# Altium PCB PDB REV 23.PcbDoc (part 2 of 2)
Units mil, origin at the board's own origin, x right, y up, seen from the top; angles counter-clockwise.
Board outline 3000 x 3000 mil, 4 copper layers (POWER/SIGNAL, SIG_GND, GND, Signal), stack 23.756 mil thick; 77 components, 56 nets, 261 pads, 101 vias.
Unrouted connection lines stored in the file: 79.
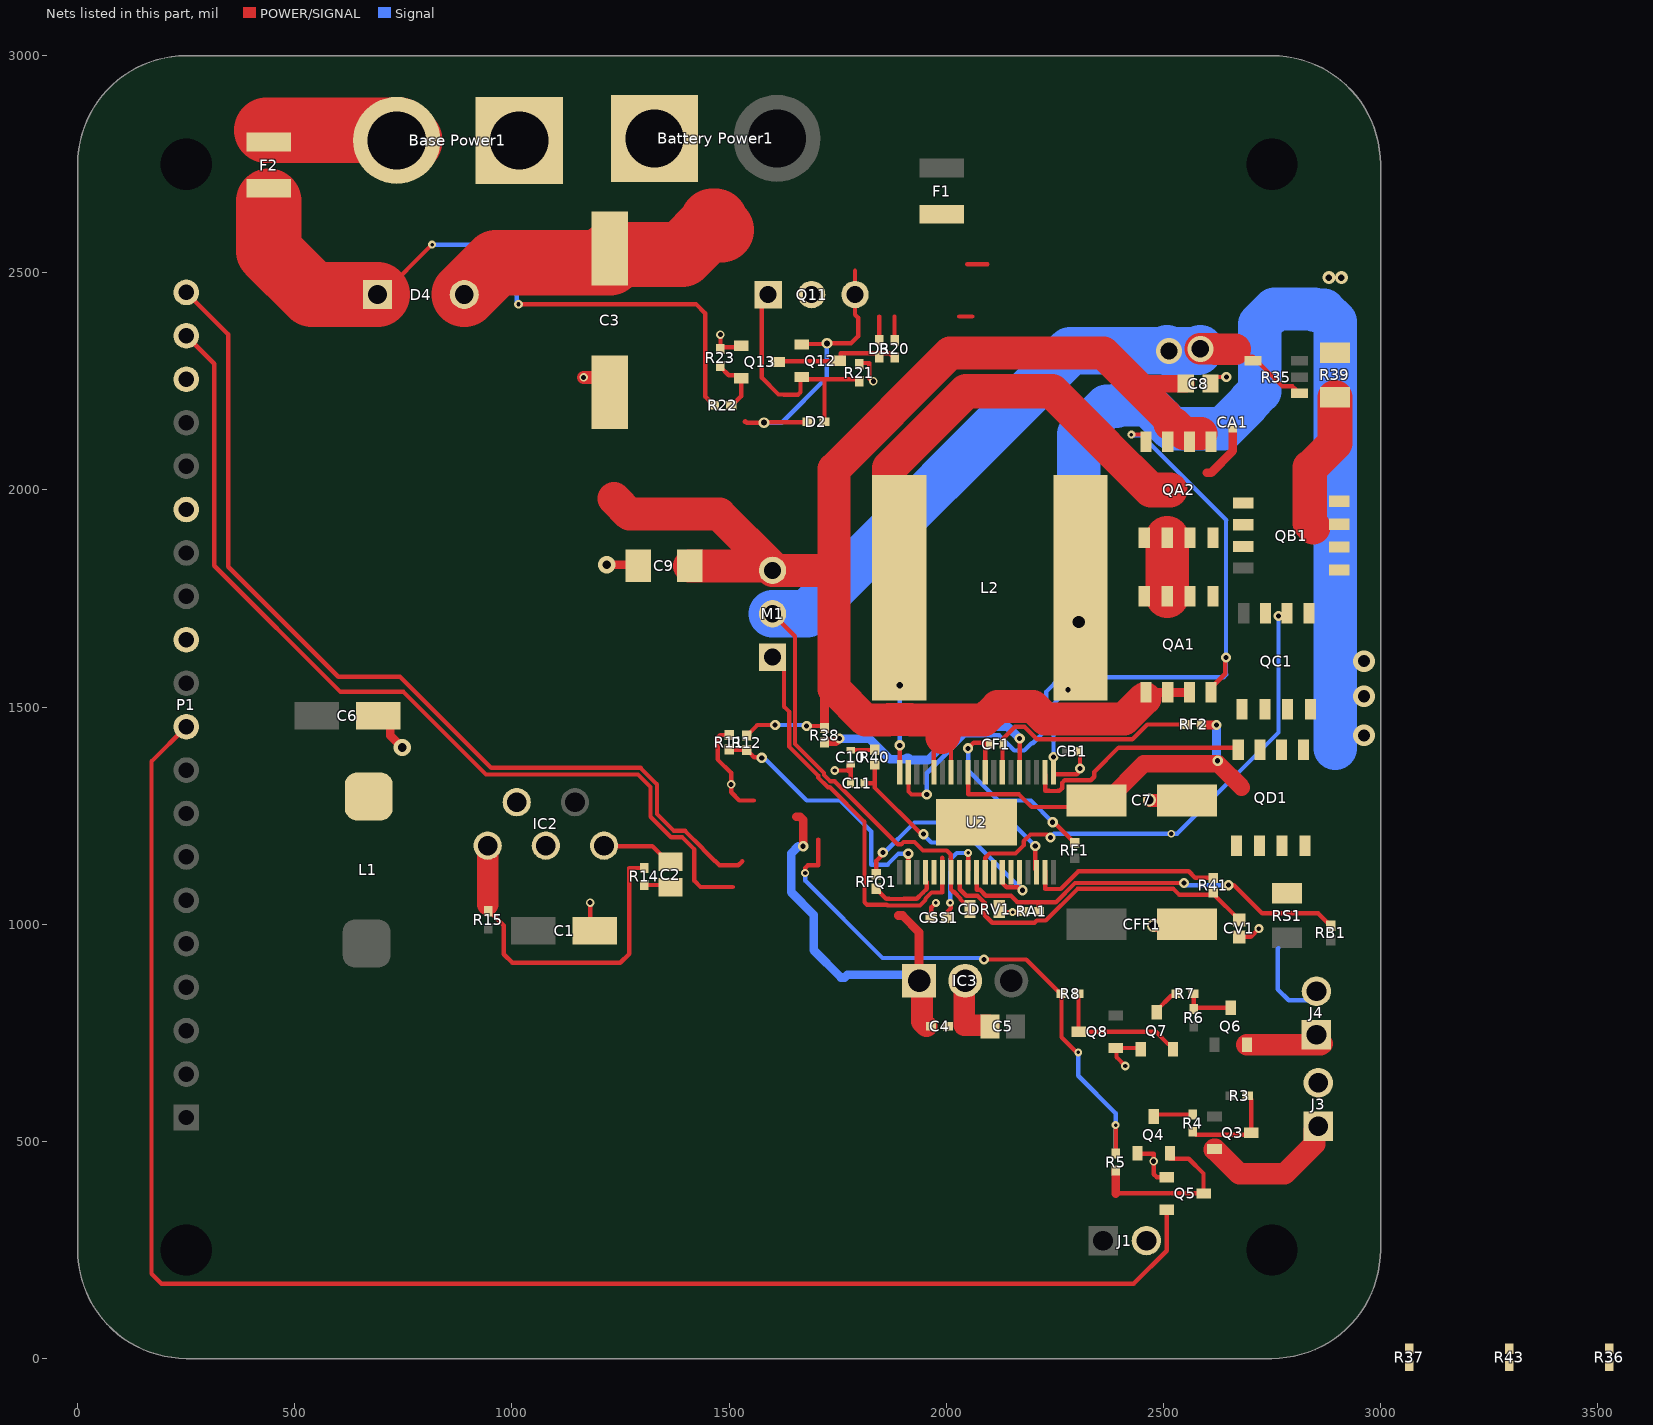
[diagram p4: the nets of this part, all layers, seen from the top]

## Via types
v1: diameter 23.62, hole 11.81, POWER/SIGNAL to Signal, 40 vias
v2: diameter 19.68, hole 11.81, POWER/SIGNAL to Signal, 12 vias
v3: diameter 18, hole 8, POWER/SIGNAL to Signal, 10 vias
v4: diameter 20, hole 10, POWER/SIGNAL to Signal, 10 vias
v5: diameter 18, hole 10, POWER/SIGNAL to Signal, 7 vias
v6: diameter 50, hole 28, POWER/SIGNAL to Signal, 4 vias
v7: diameter 45, hole 30, POWER/SIGNAL to Signal, 4 vias
v8: diameter 25, hole 14, POWER/SIGNAL to Signal, 3 vias
v9: diameter 60, hole 40, POWER/SIGNAL to Signal, 2 vias
v10: diameter 30, hole 20, POWER/SIGNAL to Signal, 2 vias
v11: diameter 40, hole 20, POWER/SIGNAL to Signal, 2 vias
v12: diameter 30, hole 15, POWER/SIGNAL to Signal, 2 vias
v13: diameter 25, hole 15, POWER/SIGNAL to Signal, 1 vias
v14: diameter 17.8, hole 8, POWER/SIGNAL to Signal, 1 vias
v15: diameter 60, hole 30, POWER/SIGNAL to Signal, 1 vias

## Nets (pads, with @x,y where several pads share a name; then routed paths per layer and width w, separated by ;. In a path a pad name is that pad's centre, name@x,y a point inside that pad or via, vN(x,y) a via of type N, cw(c..) or ccw(c..) an arc to the next point about the centre after c; other vN are vias at no path point) (continued)
DRVCC: CDRV1.2 M1.2 R35.1 R35.4 U2.7 | length 2515.7
  POWER/SIGNAL w10: M1.2@1600,1715 1651.65,1663.35 1651.65,1415.03 1718.5,1348.18 1718.5,1343.64 1733.14,1329 1743.39,1329 1887.99,1184.4 1896.41,1184.4 1901.41,1189.4 1927.05,1189.4 1946.45,1170 2001.23,1170 2010.44,1160.78 2010.44,1124.5 2010.94,1124 2010.94,1080 2017.44,1073.5 2018.94,1073.5 2033,1059.44 2033,1057.1 CDRV1.2@2055.1,1035 ; v9(2585,2325) 2619.8,2325 2620.24,2324.56 2637.4,2307.4 2696.5,2307.4 2705.5,2307.4 2774.3,2238.6 2797.5,2238.6 R35.4@2803.5,2232.6
  POWER/SIGNAL w73: v9(2585,2325) 2620.24,2324.56 2665,2324
  Signal w110: M1.2@1600,1715 1680,1715 2285.81,2320.81 v9@2502.45,2320.81 ; v9@2503.26,2320 2508.26,2325 2513,2320.26 v9(2513,2320) 2580,2320 v9(2585,2325)
FET_A: C3.1 C8.2 C9.2 D4.3 M1.3 Q11.2 QA1.1 QA1.2 QA1.3 QA2.1 QA2.2 QA2.3 R12.1 R38.1 U2.32 U2.34 | length 4523.3
  POWER/SIGNAL w10: R12.1@1541,1434.73 1541,1435.72 1546.83,1441.54 1547.81,1441.54 1565.03,1458.77 v1(1606.04,1458.77) ; v1(1678.5,1456.5) 1714.58,1456.5 1714.75,1456.67 R38.1@1719.68,1451.73 ; U2.34@1971.57,1350.16 1971.57,1410.85 1990.5,1429.77 2010.94,1409.33 U2.32@2010.94,1350.16
  POWER/SIGNAL w20: R38.1@1719.68,1451.73 1719.68,1519.86 1741.69,1541.87 ; 2396.22,1470 2398.38,1472.16 2446.38,1520.16 2457.2,1520.16 2460,1522.95 QA1.1@2460,1533.78 QA1.2@2510,1533.78 QA1.3@2560,1533.78
  POWER/SIGNAL w40: 2447.64,2230 2462.64,2245 C8.2@2551.46,2245
  POWER/SIGNAL w76: 1235,1980 1270.34,1944.66 1477.33,1944.66 1596.98,1825 C9.2@1409.06,1825 ; M1.3@1600,1815 1741.69,1815 ; 1990.5,1429.77 1995,1434.27 ; QA1.1@2457.2,1520.16 2409.2,1472.16 2398.38,1472.16 2228.72,1472.16 2203.54,1497.35 2203.54,1497.7 2199.88,1501.35 2118.24,1501.35 2086.89,1470 1919.59,1470 1917.77,1471.81 1868.23,1471.81 1866.41,1470 1813.56,1470 1741.69,1541.87 1741.69,1815 ; 2504.81,2172.7 2447.64,2229.88 2447.64,2230 2362.64,2315 2008.6,2315 1741.69,2048.09 1741.69,1815 ; 2515.8,2152.19 2525.45,2152.19 2547.64,2130 2587.2,2130
  POWER/SIGNAL w150: D4.3@890,2450 963.15,2523.15 C3.1@1225,2523.15 ; C3.1@1225,2542.31 1391.17,2542.31 1464.68,2615.82 ; 1482,2598.5 1464.68,2615.82 ; 1464.68,2615.82 1461.34,2619.16 1468.02,2619.16 1464.68,2615.82
  Signal w10: v1(1606.04,1458.77) 1676.23,1458.77 v1(1678.5,1456.5)
GND: "Base Power1.1" "Battery Power1.1" C1.2 C3.2 C4.1 C5.1 C6.2 C7.1 C8.1 C9.1 C10.2 C11.2 CDRV1.1 CFF1.1 CSS1.1 CV1.1 IC2.3 IC3.2 J1.2 J3.2 J4.2 P1.12 P1.15 P1.18 Q4.3 Q5.3 Q7.3 Q8.3 Q13.3 R11.2 R23.1 R36.2 R39.1 RA1.1 RFQ1.1 U2.4 U2.5 U2.12 U2.14 U2.15 U2.39 | length 1869.9
  POWER/SIGNAL w10: v2(1180,1050) 1180,995.87 C1.2@1190.87,985 ; v2(1480,2357.75) R23.1@1480,2324.68 1483.86,2328.54 1523.82,2328.54 Q13.3@1527.68,2332.4 ; R11.2@1500,1435.73 1479.39,1435.73 1473.53,1429.87 1473.53,1379.62 1504.68,1348.47 v2(1504.68,1322.12) 1504.68,1303.84 1523.52,1285 1556.83,1285 ; v4(1743.5,1354) 1773.68,1354 1775.16,1352.52 1775.16,1366.38 1778.03,1369.25 C10.2@1780,1369.25 1780,1325.75 C11.2@1779.25,1325 ; RFQ1.1@1838.6,1081.45 1838.6,1080.47 1844.43,1074.64 1845.41,1074.64 1861.51,1058.54 1868.35,1058.54 1868.71,1058.19 1901.87,1058.19 1902.22,1058.54 1932.28,1058.54 1945.57,1071.83 1945.57,1071.93 1955,1081.36 1955,1097.39 1951.89,1100.5 U2.4@1951.89,1124 ; CSS1.1@1965.79,1015 1965.79,1039.06 1975.87,1049.14 v3(1976.23,1049.14) ; CDRV1.1@2122.03,1035 2129.03,1028 v3(2152.68,1028) 2178.53,1028 RA1.1@2179.91,1029.38 ; v4(2412.43,673.61) 2391.99,694.05 2391.99,713.05 Q8.3@2390.04,715 2445.32,715 Q7.3@2447.64,712.68 ; Q4.3@2440.24,472.6 2441.06,471.78 2477.64,471.78 v2(2477.64,454.21) 2477.64,424.54 2485.04,417.14 2485.04,417.56 Q5.3@2507.85,417.56 ; v10(2477.31,996.73) v10@2480.02,996.73 ; C8.1@2608.54,2245 2623.64,2260.1 v1(2645,2260.1) ; CV1.1@2675,971.02 2701.02,971.02 v4(2720,990)
  POWER/SIGNAL w20: C6.2@691.73,1480 720,1451.73 720,1434.12 v11(747,1407.12) ; C3.2@1217.87,2259.16 1225,2252.04 C3.2@1225,2239.16 ; v11(1218.47,1827.61) 1288.34,1827.61 C9.1@1290.94,1825
  POWER/SIGNAL w30: v2(1165,2259.16) C3.2@1217.87,2259.16 ; v10(2467.66,1285.91) 2468.58,1285 C7.1@2556.5,1285 ; v10@2480.02,996.73 2553.23,996.73 CFF1.1@2556.5,1000
  POWER/SIGNAL w50: IC3.2@2041.3,877.5 2041.3,767.4 C5.1@2097.13,767.4
  Signal w10: 2765,945 2763.54,943.54 2763.54,850 2788.54,825 J4.2@2865.04,825
  other v12: 2881,2489 2910.16,2489
GPOS: "Base Power1.2" F2.1 | length 339.7
  POWER/SIGNAL w150: 435,2828.5 741.5,2828.5 765,2805
"Main Chute": P1.10 Q5.2 | length 3766.5
  POWER/SIGNAL w10: P1.10@250,1455 170,1375 170,195 193,172 2431.5,172 2507.85,248.35 Q5.2@2507.85,342.76
NDRV: M1.1 U2.6 | length 931.6
  POWER/SIGNAL w10: M1.1@1600,1615 1626.5,1588.5 1626.5,1501.23 1638.1,1489.62 1638.1,1409.42 1704.96,1342.57 1704.96,1338.03 1727.53,1315.46 1732.07,1315.46 1811.81,1235.71 1811.81,1050.86 1817.67,1045 1862.74,1045 1864.55,1043.19 1939.41,1043.19 1952.23,1056.02 1952.23,1059.08 1966.29,1073.14 1990.76,1073.14 1990.76,1123.5 1991.26,1124 1990.76,1124.5 1990.76,1153.46
NetC2_1: C2.1 R14.2 | length 62.2
  POWER/SIGNAL w10: R14.2@1305,1090.31 1359.69,1090.31 C2.1@1365,1085
NetC2_2: C2.2 IC2.5 | length 167.9
  POWER/SIGNAL w10: IC2.5@1212.01,1180 1323.15,1180 1359.09,1144.06 C2.2@1365,1144.06
NetC4_2: C4.2 IC3.1 | length 925.6
  POWER/SIGNAL w20: 1655.25,1247.6 1663.19,1247.6 1670.5,1240.29 v1(1670.5,1179.5) ; 1889.68,1020 1899.13,1020 1937.4,981.73 1937.4,875.1 IC3.1@1937.4,870
  POWER/SIGNAL w50: IC3.1@1935,877.5 1937.4,875.1 1943.96,868.54 1943.96,775.25 1954.21,765 C4.2@1955,765
  Signal w20: v1(1670.5,1179.5) 1659.5,1179.5 1642.92,1162.92 1642.92,1073.54 1695.16,1021.3 1695.16,939.84 1757.5,877.5 1766.19,877.5 1772.4,883.71 1928.79,883.71 IC3.1@1935,877.5
NetC10_1: C10.1 R40.2 | length 55.4
  POWER/SIGNAL w10: C10.1@1780,1400.75 1780.49,1401.24 1834.51,1401.24 R40.2@1835,1401.73
NetC11_1: C11.1 R40.1 U2.13 | length 599.4
  POWER/SIGNAL w10: C11.1@1810.75,1325 1835,1325 ; R40.1@1835,1368.27 1835,1325 ; v1(1947.5,1207.5) 1942.5,1207.5 1835,1315 1835,1325 ; U2.13@2129.06,1124 2129.56,1123.5 2129.56,1094.54 2139.1,1085 2165.08,1085 2171.89,1078.19 v1(2175.58,1078.19)
  Signal w10: v1(1947.5,1207.5) 1947.5,1206.19 1965.43,1188.25 2065.52,1188.25 v1(2175.58,1078.19)
NetCF1_1: CF1.1 RF1.1 U2.28 | length 501.1
  POWER/SIGNAL w10: v1(2050.31,1405) 2063.58,1418.27 2099.25,1418.27 CF1.1@2099.25,1415 2089.68,1415 U2.28@2089.68,1346 ; v1(2245,1235) 2248.35,1235 RF1.1@2295.63,1187.72
  Signal w10: v1(2050.31,1405) 2050.31,1354.69 2120,1285 2195,1285 v1(2245,1235)
NetCF1_2: CF1.2 RF2.1 U2.26 | length 538.2
  POWER/SIGNAL w10: U2.26@2129.06,1346 2129.56,1346.5 2129.56,1411.66 CF1.2@2131.85,1413.96 ; CF1.2@2129.56,1417.91 2129.56,1425.97 2158.39,1454.81 2180.25,1454.81 2209.45,1425.61 2428.48,1425.61 2462.87,1460 RF2.1@2552.32,1460
NetCSS1_2: CSS1.2 U2.9 | length 227.2
  POWER/SIGNAL w10: CSS1.2@2000.43,1015 2001.22,1015 2003.43,1017.2 2003.43,1029.38 2010.76,1036.72 2010.76,1044.81 2009,1046.57 v3(2009,1049.5) ; U2.9@2050.32,1124 v3(2050.32,1164.19)
  Signal w10: v3(2009,1049.5) 2009,1148.87 2024.32,1164.19 v3(2050.32,1164.19)
NetD2_1: D2.1 Q11.1 Q12.2 R21.1 | length 576.1
  POWER/SIGNAL w10: Q11.1@1590,2450 1575,2435 1575,2258.82 1613.82,2220 1625,2220 1625.47,2219.53 1658.55,2219.53 1664.41,2225.39 1664.41,2256.83 Q12.2@1667.68,2260.1 1672.57,2255.21 1720,2255.21 ; D2.1@1719.68,2157.2 1719.68,2254.89 1720,2255.21 ; R21.1@1800,2250.36 1795.16,2255.21 1720,2255.21
NetD3_1: D3.1 Q12.1 R20.1 R43.2 | length 283.6
  POWER/SIGNAL w10: 1612.32,2295 1613.57,2296.25 1751.07,2296.25 Q12.1@1752.32,2297.5 1757.24,2297.5 1757.24,2315 1869.25,2315 R20.1@1875.02,2309.23
NetIC2_1: IC2.1 R14.1 R15.1 | length 789.4
  POWER/SIGNAL w10: R15.1@945,1029.68 948.5,1029.68 981.11,997.07 981.11,930.86 1000.86,911.11 1249.36,911.11 1270,931.76 1270,1129.68 R14.1@1305,1129.68
  POWER/SIGNAL w50: 943.98,1045 IC2.1@943.98,1180
NetIC2_2: IC2.2 L1.2
NetJ3_1: J3.1 Q3.2 | length 326.4
  POWER/SIGNAL w50: Q3.2@2617.72,481.46 2618.86,481.46 2674.82,425.5 2779.48,425.5 2847.78,493.8 2847.78,526 J3.1@2856.73,534.96
NetJ4_1: J4.1 Q6.2 | length 173.6
  POWER/SIGNAL w50: Q6.2@2692.44,722.68 2862.72,722.68 J4.1@2865.04,725
NetP1_19: P1.19 | length 2138.8
  POWER/SIGNAL w10: P1.19@250,2355 314.53,2290.47 314.53,1825.47 605,1535 750,1535 940,1345 1290,1345 1319.09,1315.91 1319.09,1247.5 1366.6,1200 1392.4,1200 1420,1172.4 1420,1100 1434.1,1085.9 1508.23,1085.9
NetP1_20: P1.20 | length 2184
  POWER/SIGNAL w10: P1.20@250,2455 346.64,2358.36 346.64,1823.36 600,1570 742.28,1570 952.28,1360 1296.21,1360 1334.09,1322.12 1334.09,1253.71 1372.81,1215 1398.61,1215 1440,1173.61 1440,1172.76 1467.76,1145 1468.61,1145 1477.72,1135.9 1508.23,1135.9 1521.22,1135.9 1530,1144.68
NetQ3_1: Q3.1 R3.1 R4.2 | length 218.8
  POWER/SIGNAL w10: R4.2@2575.04,515 2697.36,515 Q3.1@2702.36,520 2702.36,597.05 2701.22,598.19 2701.22,600.16 2696.38,605 R3.1@2694.41,605
NetQ4_1: Q4.1 R4.1 | length 91.8
  POWER/SIGNAL w10: Q4.1@2477.64,557.24 2482.26,561.87 R4.1@2567.54,561.87
NetQ4_2: Q4.2 Q5.1 R5.1 | length 400.3
  POWER/SIGNAL w10: 2390.2,380.16 2515.04,380.16 ; Q4.2@2515.04,472.6 2515.04,460.1 2558.39,460.1 2592.5,425.98 Q5.1@2592.5,380.16 2519.8,380.16 2519.96,380
  POWER/SIGNAL w20: R5.1@2390.02,432.66 2390.02,380.33 2390.2,380.16
NetQ6_1: Q6.1 R6.1 R7.2 | length 121.6
  POWER/SIGNAL w10: R7.2@2569.41,840 2569.72,839.69 2569.72,805 R6.1@2570.04,804.68 ; R6.1@2570.04,809.69 2572.4,807.32 Q6.1@2655.04,807.32
NetQ7_1: Q7.1 R7.1 | length 65.6
  POWER/SIGNAL w10: Q7.1@2485.04,797.32 2485.04,802.24 2517.95,835.16 2525.2,835.16 R7.1@2530.04,840
NetQ7_2: Q7.2 Q8.1 R8.1 | length 324.3
  POWER/SIGNAL w10: R8.1@2304.68,840 2304.68,753.11 Q8.1@2305.39,752.4 2482.72,752.4 2510.71,724.41 2515.63,724.41 2522.44,717.6 Q7.2@2522.44,712.68
NetQ13_1: Q13.1 R43.1
NetQ13_2: Q13.2 R23.2 R37.1 | length 133.6
  POWER/SIGNAL w10: R23.2@1480,2285.31 1480,2283.35 1498.94,2264.41 1520.87,2264.41 Q13.2@1527.68,2257.6 1527.68,2216.02 1506.65,2195 1504.68,2195
NetR11_1: R11.1 R12.2 U2.2 | length 616.6
  POWER/SIGNAL w10: R11.1@1500,1402.27 1501,1401.27 R12.2@1541,1401.27 1541,1400.28 1546.83,1394.46 1547.81,1394.46 1558.08,1384.19 1574,1384.19 v1(1575,1383.19) ; U2.2@1912.52,1124 v1(1912.52,1162.59)
  Signal w10: v1(1575,1383.19) 1580.19,1383.19 1678.57,1284.81 1755.95,1284.81 1827.05,1213.71 1827.05,1137.34 1864.98,1137.34 1890.22,1162.59 v1(1912.52,1162.59)
NetR21_2: R21.2 R36.1 | length 59.9
  POWER/SIGNAL w10: 1810,2292.29 1822.6,2292.29 1822.6,2257.4 1829.64,2250.36 v2(1832.07,2250.36)
NetR22_1: R22.1 R37.2
NetR38_2: R38.2 U2.24 | length 602.5
  POWER/SIGNAL w10: U2.24@2168.43,1346 2170,1347.57 2169,1348.57 v1(2169,1427.5)
  POWER/SIGNAL w20: R38.2@1719.68,1418.27 1719.68,1419.25 1720.51,1420.08 1745.49,1420.08 1752.93,1427.51 v1(1753.91,1427.51)
  Signal w20: v1(1753.91,1427.51) 1822.49,1427.51 1869.81,1380.19 1906.18,1380.19 1909.18,1383.19 1912.32,1383.19 1917.32,1378.19 1958.19,1378.19 2035,1455 2141.53,1455 v1(2169,1427.5)
NetR41_2: R41.2 U2.18 | length 453
  POWER/SIGNAL w10: U2.18@2227.48,1124 2227.98,1123.5 2227.98,1081.3 2263.77,1081.3 2304.28,1121.81 2558.51,1121.81 2573.59,1106.73 R41.2@2615,1106.73
NetRFQ1_2: RFQ1.2 U2.17 | length 521.1
  POWER/SIGNAL w10: RFQ1.2@1838.6,1114.91 1838.6,1145.89 1854,1161.28 v1(1854,1165) ; v1(2205,1180) 2205,1126.8 U2.17@2207.8,1124
  Signal w10: v1(1854,1165) 1854,1161.28 1927.03,1234.31 2150.69,1234.31 v1(2205,1180)
PGOOD: CV1.2 R41.1 U2.8 | length 804.4
  POWER/SIGNAL w10: U2.8@2030.63,1124 2031.13,1123.5 2031.13,1080.46 2045.92,1065.67 2072.04,1065.67 2088.57,1049.14 2088.57,1020.86 2105.88,1003.54 2203.16,1003.54 2208.17,1008.55 2229.33,1008.55 2302.23,1081.46 2523.03,1081.46 2536.3,1068.19 2609.92,1068.19 R41.1@2615,1073.27 2615,1069.61 CV1.2@2675,1009.61
SENSE: QB1.5 QB1.6 QB1.7 QB1.8 QC1.1 QC1.2 QC1.3 R39.2 U2.11 | length 1439.6
  POWER/SIGNAL w10: U2.11@2089.68,1124 2089.68,1152.96 2099.73,1163 2119.01,1163 2119.21,1162.8 2119.41,1163 2138.7,1163 2138.9,1162.8 2139.1,1163 2159.64,1163 2178.19,1181.55 2178.19,1191.11 2193.89,1206.81 2233.19,1206.81 v1(2240,1200) ; 2836.8,2052.4 2836.8,2060
  POWER/SIGNAL w80: 2845,1915 2836.8,1923.2 2836.8,2052.4 2840.02,2052.4 2895,2107.38 R39.2@2895,2213.82
  Signal w10: v1(2240,1200) 2248.19,1208.19 2518.02,1208.19 v5(2518.08,1208.25) 2531.63,1208.25 2765,1441.61 v1(2765,1710)
SW1: CA1.1 L2.2 QA1.5 QA1.6 QA1.7 QA1.8 QA2.5 QA2.6 QA2.7 QA2.8 QB1.1 QB1.2 QB1.3 U2.38 | length 1759.1
  POWER/SIGNAL w10: U2.38@1892.83,1346 1892.83,1411.83 v1(1893,1412) ; 2485,1730 2485,1919.96 2485.04,1920
  POWER/SIGNAL w20: 2600,2040 2610,2040 2660,2090 CA1.1@2660,2140.35
  POWER/SIGNAL w80: L2.2@1891.81,1775 1869.21,1797.6 1869.21,2051.21 2045.62,2227.62 2243.54,2227.62 2367.6,2103.56 2367.6,2103.25 2470.85,2000 2515,2000
  POWER/SIGNAL w100: QA1.7@2509,1755 QA2.6@2509,1890
  Signal w10: v13(1892.83,1550) 1893,1549.83 v1(1893,1412)
SW2: CB1.2 L2.1 QC1.5 QC1.6 QC1.7 QC1.8 QD1.1 QD1.2 QD1.3 U2.20 | length 2605
  POWER/SIGNAL w10: v1(2247,1385) 2247,1385.35 2247.17,1385.18 2247.17,1345.5 2300.5,1345.5 v1@2309,1354 ; v1@2304.5,1358.5 2305.87,1357.13 2307.25,1358.5 v1(2308,1358.5) ; CB1.2@2305.75,1398.72 2308,1396.47 v1(2308,1358.5) ; v1@2306.5,1358.5 v1(2308,1358.5) ; QC1.5@2676.65,1491 QC1.5@2681,1495.35
  Signal w10: v1(2247,1385) 2247,1503 2245,1505 v1(2280,1540)
  Signal w100: v6(2305,1696) 2305,2129 2369,2193 2391.51,2193 2395.06,2196.54 2464,2196.54 2519.83,2140.71 2637.42,2140.71 2696,2199.29 2696,2201.51 2722,2227.51 2722,2382 2756.81,2416.81 2847.12,2416.81 2849.93,2414 2869,2414 2896,2387 2896,1405
  other v6: 2962.11,1435 2962.11,1525 2962.11,1605.85
TG1: QA1.4 QA2.4 U2.37 | length 1799.1
  POWER/SIGNAL w10: U2.37@1912.52,1346 1913.02,1345.5 1913.02,1305.67 1920,1298.69 1954.69,1298.69 v1(1955,1299) ; v14(2426.5,2127.64) 2450.85,2127.64 2452.2,2129 2460,2121.2 QA2.4@2460,2111.22 ; QA1.4@2610,1533.78 2610,1544.61 2642.39,1577 2642.39,1612.53 v1(2644.33,1614.47)
  Signal w10: v1(1955,1299) 1955,1347.6 2042.4,1435 2121.72,1435 2156.72,1400 2179.74,1400 2196.55,1416.81 2199.31,1416.81 2230,1447.5 2230,1535 2263.7,1568.7 2638.7,1568.7 2645,1575 2644.33,1575.67 v1(2644.33,1614.47) 2644.33,1930.02 2645,1930.69 2449.3,2126.39 2425.61,2126.39 2426.5,2127.29 v14(2426.5,2127.64)
TG2: QD1.4 U2.21 | length 540.5
  POWER/SIGNAL w10: U2.21@2227.48,1346 2227.98,1345.5 2227.98,1307.02 2237.5,1307.02 2256.81,1307 ; 2256.83,1307.02 2260.38,1307.02 2266.77,1313.41 2266.77,1325.56 2272.63,1331.42 2311.15,1331.42 2311.42,1331.69 2332.61,1331.69 2340.81,1339.89 2340.81,1350.69 2396.93,1406.81 2667.32,1406.81 QD1.4@2672.4,1401.73
VAT: R5.2 R8.2 | length 1296.5
  POWER/SIGNAL w10: v5(1675.11,1117.87) 1675.11,1129.7 1680.96,1135.56 1705.17,1135.56 1705.51,1135.9 1705.51,1195 ; v1(2086.89,918.98) 2184.37,918.98 2263.35,840 R8.2@2265.31,840 2265.31,739.69 2300,705 v3(2304,705) ; R5.2@2390.02,472.03 v3(2389.98,537.34)
  Signal w10: v5(1675.11,1117.87) 1675.11,1100.52 1853.38,922.24 v1@2086.89,922.24 ; v3@2299.92,705.08 2300,705 v3(2304,705) 2304,651 2390,565 2390,485
VBAS: D4.1 F2.2 R22.2 | length 1537.5
  POWER/SIGNAL w10: D4.1@690,2450 701,2450 v3(816.04,2565) ; v4(1015,2428) 1423.67,2428 1445,2406.67 1445,2215 R22.2@1460.16,2199.84 ; R22.2@1458.5,2199.84 1463.35,2195 R22.2@1465.31,2195
  POWER/SIGNAL w150: 440,2665 440,2550 540,2450 D4.1@690,2450
  Signal w10: v3(816.04,2565) 946,2565 1010.98,2500.02 1010.98,2435 ccw(c1015,2439.01) 1015,2433.34 v4(1015,2428)
VBAT: D2.2 D3.2 F1.2 Q11.3 Q12.3 R20.2 | length 883.1
  POWER/SIGNAL w10: 1535.78,2157.2 1537.18,2158.6 1540.78,2155 v8(1580,2155) 1581.1,2156.1 1679.21,2156.1 D2.2@1680.31,2157.2 ; Q12.3@1667.68,2334.9 1669.11,2336.33 1723.57,2336.33 v8(1725,2337.76) 1780.68,2337.76 1797,2354.09 1797,2396.5 1790,2403.5 Q11.3@1790,2450 ; Q11.3@1782.68,2442.68 Q11.3@1790,2450 ; 1790,2505 Q11.3@1790,2450 ; D3.2@1846,2354.59 1846,2399.69 ; R20.2@1881,2354.59 1881,2399.69 ; 2030,2399.69 2060,2399.69 ; 2048.15,2520 2048.46,2519.69 2095,2519.69
  Signal w10: v8(1580,2155) 1621.22,2155 1725,2258.78 v8(1725,2337.76)
VFB: RA1.2 RB1.1 U2.10 | length 952.9
  POWER/SIGNAL w10: U2.10@2070,1124 2070.5,1123.5 2070.5,1079.5 2070.79,1079.21 2077.65,1079.21 2091.19,1065.67 2148.95,1065.67 2163.76,1050.86 2211.57,1050.86 ; RA1.2@2213.37,1029.38 2213.08,1029.68 2213.08,1049.35 2211.57,1050.86 ; v1(2547.4,1095) 2296.62,1095 2252.48,1050.86 2211.57,1050.86 ; v1(2650,1090) 2662.44,1090 2727.44,1025 2856.73,1025 2878.19,1003.54 2879.17,1003.54 2885,997.72 RB1.1@2885,996.73
  Signal w10: v1(2547.4,1095) 2552.4,1090 v1(2650,1090)
VOUTSNS: C7.2 QD1.5 QD1.6 QD1.7 QD1.8 RF2.2 RS1.1 U2.30 | length 889.9
  POWER/SIGNAL w10: U2.30@2050.31,1346 2050.31,1299 2167.64,1299 2196.64,1270 2328.5,1270 C7.2@2343.5,1285
  POWER/SIGNAL w20: RF2.2@2587.76,1460 2586.52,1458.77 v1(2622.32,1458.77) ; v1@2623.86,1371.14 2625,1372.28 v1(2625,1376.57)
  POWER/SIGNAL w40: C7.2@2343.5,1285 C7.2@2345.67,1285 2370.5,1285 2454.75,1369.25 2625.75,1369.25 2680,1315 ; RS1.1@2774.17,1071.18 RS1.1@2785,1071.18
  Signal w20: v1(2622.32,1458.77) 2622.32,1380.24 2625,1377.55 v1(2625,1376.57)
pads on no net: P1.1 P1.2 P1.3 P1.4 P1.5 P1.6 P1.7 P1.8 P1.9 P1.16 P1.17 R35.2 R35.5 U2.3 U2.16 U2.23 U2.25 U2.27 U2.29 U2.31 U2.33 U2.35
copper on no net: | length 22243.8
  POWER/SIGNAL w10: v2(450,2052.4) 495.35,2052.4 ; 495.35,1977.6 500.28,1977.6 507.09,1970.79 507.09,1948.77 515.86,1940 v5(1090,1940) ; 580,2015 584.92,2015 611.57,1988.35 625.16,1988.35 630,1983.5 ; 629.68,2020 630,2020.31 630,2054.68 630.31,2055 630.31,2150.31 690,2210 ; v3(641.57,1641.57) 665.2,1641.57 ; 669.37,1983.5 669.53,1983.66 669.53,2054.84 669.68,2055 671.65,2055 695.7,2079.04 703.69,2079.04 v5(704.65,2080) ; v3(794.48,1551.74) 971.22,1375 1302.43,1375 1350,1327.43 1350,1259.02 1379.02,1230 1404.83,1230 1455,1179.83 1455,1178.98 1473.98,1160 1555,1160 1615,1100 1615,965 1644.1,935.9 1721.77,935.9 ; 1305,860 1329.53,884.53 1329.53,941.56 1378.29,990.31 1441.5,990.31 ; v5(1310,2004.13) 1531.42,2004.13 1555.21,2027.91 ; v2(1334.09,2120) 1334.41,2119.68 1361.14,2119.68 ; 1361.14,2080.31 1361.14,2078.35 1411.57,2027.91 1456.79,2027.91 1505.64,2027.91 1530.12,2052.4 1610.24,2052.4 1612.32,2050.31 ; 1400,2079.72 1432.31,2079.72 1438.16,2073.87 1438.16,2072.13 1444.97,2065.31 1456.79,2065.31 1502.87,2065.31 v4(1504.68,2063.5) ; 1400,2119.09 1428.6,2119.09 1444.97,2102.72 1456.79,2102.72 1468.6,2102.72 1475.41,2109.53 1475.41,2138.17 1494.44,2157.2 1496.41,2157.2 ; 1441.5,1029.68 1444.61,1032.79 1505.12,1032.79 1508.23,1035.9 ; v4(1455,830) 1502.33,830 1508.23,835.9 ; 1555.21,2102.72 1561.73,2096.2 1607.48,2096.2 1612.32,2091.36 1612.32,2089.68 1614,2091.36 1631.78,2091.36 1670.42,2130 1752.97,2130 1987.97,2365 2510,2365 2561.18,2416.18 2561.18,2943.67 2223.67,2943.67 2170,2890 2250.31,2809.69 2250.31,2775 ; 1556.83,1322.4 1568.64,1322.4 1583.02,1308.02 1583.38,1308.02 1621.63,1269.77 1621.63,1114.58 1630,1106.21 1630,992.01 1636.11,985.9 1721.77,985.9 ; 1721.77,885.9 1705.53,885.9 1674.76,855.13 1674.76,817.76 1680.62,811.9 1806.84,811.9 1903.74,715 2109.04,715 2270,554.04 2270,519.53 2271.89,517.64 ; v5(1728.01,1165) 1736.27,1165 1742.91,1171.65 1742.91,1195 1744.88,1195 ; 2020.14,677.28 2022.15,679.28 v2(2061.91,679.28) ; v8(2095,2450) 2095,2480.32 ; 2135.31,2394.15 2125,2404.47 2125,2680 2185,2740 2250.32,2740 2248.66,2738.34 2248.66,2680.2 2247,2678.54 ; v2(2155.47,2440) 2155.47,2490.32 ; 2174.68,2394.15 2174.95,2394.42 2215.05,2394.42 2215.31,2394.68 2217.76,2397.14 2217.76,2419.53 2247,2448.76 2247,2465 ; v3(2190,673.5) 2305.39,558.11 2305.39,452.72 2271.89,419.21 ; 2197,2465 2197,2481.24 ; 2197,2678.54 2197,2664.82 ; v4(2234.49,469.06) 2234.49,517.64 ; 2254.68,2394.68 2255.51,2395.51 2354.49,2395.51 2355.31,2396.34 2351.16,2400.5 2351.16,2460.84 2347,2465 ; 2270,2890 2294.53,2865.47 2294.53,2831.36 2397,2728.89 2397,2678.54 ; 2289.68,2775 2289.68,2740 2326.81,2740 2347,2719.81 2347,2678.54 ; 2297,2465 2297,2481.24 2273.22,2505.02 2220.78,2505.02 2197,2481.24 ; 2297,2678.54 2297,2662.3 2269.69,2635 2224.3,2635 2197,2662.3 2197,2664.82 ; 2385,2795 2389.84,2790.16 2389.84,2768.19 2438.22,2719.81 2438.22,2687.32 2447,2678.54 ; 2385,2834.37 2385,2874.69 ; 2397,2465 2395.84,2463.84 2395.84,2397.5 2394.68,2396.34 2428.26,2396.34 v4(2425,2399.61) ; 2425,2795 2425,2766.78 2497,2694.78 2497,2678.54 ; 2425,2834.37 2425,2875.32 ; 2447,2465 2447,2424 2466.36,2404.64 2524.64,2404.64 2540,2420 2540,2714.7 2505,2749.7 2505,2790.63 ; 2465,2795 2465,2768.48 2525,2708.48 2525,2509.24 2497,2481.24 2497,2465 ; 2465,2834.37 2465,2875 ; 2505,2830 2505,2875.31 ; 2197,2481.24 2188.22,2490.02 2188.22,2494.97 2155.47,2527.72 2155.47,2529.69 2155.63,2529.84 2155.63,2637.18 2174.49,2656.04 2188.22,2656.04 2197,2664.82
  POWER/SIGNAL w20: 665.2,1740 638.35,1740 611.57,1713.23 611.57,1601.72 623.29,1590 977.22,1590 1004.06,1590 1020,1574.05 1159.05,1435 v1(1280,1435) ; 702.6,1641.57 702.6,1682.6 v5(703,1683) ; v1(1614.61,1395) 1644.41,1365.19 1644.41,1324.21 1646.22,1322.4 1655.25,1322.4 1669.37,1322.4 1785.58,1206.19 v1(1785.58,851.9) 1769.57,835.9 1738.01,835.9 ; v2(2349,2899) 2364.69,2914.69 2384,2914.69 2425,2914.69 2505,2914.69 2519.45,2914.69 v2(2535.14,2899) ; 1738.01,835.9 1737.56,835.45 1722.22,835.45 1721.77,835.9 1738.01,835.9
  GND w20: 250,250 139,361 139,2639 250,2750 401,2750 479,2672 1894,2672 1972,2750 2750,2750 2829.31,2670.69 2829.31,2093.31 2917.11,2005.52 2917.11,417.11 2750,250
  Signal w10: v3(641.57,1641.57) 704.65,1641.57 v3(794.48,1551.74) ; v5(704.65,2080) 760,2080 890,2210 ; v5(1090,1940) 1245.87,1940 v5(1310,2004.13) ; v8(2095,2450) 2109,2450 2120,2461 2120,2557 2136.69,2573.69 v4(2154.31,2573.69) ; v3@2189,679.39 2189,767.53 2189,771.44 v4(2198.92,771.44)
  Signal w20: v1(1280,1435) 1575,1435 1614.61,1395.39 v1(1614.61,1395) ; v1(1785.58,851.9) 1785.58,839.42 1857.47,767.53 2189,767.53 v4@2195,767.53

## Polygon pours and split planes (outlines as drawn)
24VOUT on POWER/SIGNAL "`" (solid, pour order 44): 1595,1265 1595,1187.72 1473.98,1187.72 1473.98,1265
no net on POWER/SIGNAL "`" (solid, pour order 3): 825,2500 955,2500 955,2405 830,2280 775,2280 745,2250 745,2150 615,2150 615,2290
no net on POWER/SIGNAL "`" (solid, pour order 46): 2495.04,2085
DRVCC on POWER/SIGNAL "`" (solid, pour order 40): 2622.32,2373.15 2550.53,2373.15 2535.14,2357.75 2469.96,2357.75 2469.96,2288.15 2585.52,2288.15 2622.32,2324.95
no net on POWER/SIGNAL "`" (solid, pour order 42): 2730,2288.15
FET_A on POWER/SIGNAL "`" (solid, pour order 13): 747.94,2095 747.94,2080 ccw(c803.97,2076.03) 800,2020 1125,2015 cw(c1136.59,1988.41) 1163.19,2000 1268.93,1995 1268.93,2045 ccw(c1201.22,2055.71) 1225,2120
no net on POWER/SIGNAL "`" (solid, pour order 17): 1305,1740
no net on POWER/SIGNAL "`" (solid, pour order 7): 745,2150
no net on POWER/SIGNAL "`" (solid, pour order 5): 745,2250
GND on SIG_GND "`" (solid, pour order 54): 50,250 50,2750 cw(c247,2755) 242,2952 2750,2950 cw(c2750,2750) 2950,2750 2950,275 cw(c2737.5,262.5) 2750,50 250,50 cw(c250,250)
no net on SIG_GND "`" (solid, pour order 51): 1400,3004
no net on SIG_GND "`" (solid, pour order 49): 2999,2751

## Other copper
POWER/SIGNAL:
  rectangle net FET_A: 1163.19,1965.1 1280,2107.5
  rectangle net FET_A: 825,2080 1280,2130
  rectangle net FET_A: 1366.6,1760.16 1779.25,1983.5
  rectangle net SENSE: 2720.16,1680 2930,1830.04
  rectangle net SW1: 2517.15,1855 2720,2000
  rectangle net SW2: 2696.38,1365 2945,1670
  rectangle net VOUTSNS: 2732.8,1035 2835,1280
  rectangle net GND: 2860,2335 2930,2519.69
  rectangle net FET_A: 2432.05,1495 2585,1566.57
  rectangle net FET_A: 2495,2080 2625,2170
  rectangle net 24VOUT: 1473.98,1187.72 1595,1265
  rectangle net DRVCC: 2640,2288.15 2730,2354.78
  rectangle net FET_A: 750,2100 847.65,2150.31
  rectangle net FET_A: 1163.19,1871 1440,1983.66
  rectangle net FET_A: 1163.19,1910 1270,1920
  rectangle net FET_A: 750,2150.31 847.65,2250
  rectangle net FET_A: 1637.76,2375 1735,2571.77
  rectangle net FET_A: 1479.69,2565 1735,2675
  rectangle net BATTPOS: 1535,2690 2075,2920
  rectangle net VBAT: 1915,2385 2070,2675
  rectangle net VBAT: 1745,2385 2065,2535
  region: 1717.32,2570
  region: 1940,2430
SIG_GND:
  pour cut-out: 2945,2170

## Silkscreen, mask and mechanical layers (free items; w line width, h text height)
Mechanical 1:
  lines w47.24: 0,250 ccw(c250,250) 250,0 2750,0 ccw(c2750,250) 3000,250 ; 0,250 0,2750 ; 0,250 0,250 ; 0,2750 cw(c250,2750) 250,3000 ; 0,2750 0,2750 ; 250,3000 2750,3000 cw(c2750,2750) 3000,2750 ; 250,3000 250,3000 ; 3000,250 3000,250 ; 3000,250 3000,2750 ; 3000,2750 3000,2750

## Text inside footprints (layer, text, board x,y; h text height)
D4: Top Overlay "1" at 680.16,2315.16 h59.06; Top Overlay "3" at 870.32,2315.16 h59.06
R35: Top Overlay "*" at 2684,2314.4 h50; Mechanical 7 "Default Padstyle: RX40Y22D0T" at 2410,2003 h50; Mechanical 7 "Pin One Padstyle: RX40Y22D0T" at 2410,1943 h50; Mechanical 7 "Alt 1 Padstyle: OX60Y90D30P" at 2422.5,1763 h50; Mechanical 7 "Alt 2 Padstyle: OX90Y60D30P" at 2422.5,1703 h50; Mechanical 7 "0.067in/1.702mm" at 2666.25,2412 h25; Mechanical 7 "0.119in/3.023mm" at 2666.25,2487 h25; Mechanical 7 "0.114in/2.896mm" at 2913.5,2247.5 h25; Mechanical 7 "0.037in/0.95mm" at 2411.5,2266.2 h25; Mechanical 7 "0.024in/0.61mm" at 2625,2083 h25; Mechanical 13 "*" at 2729,2264 h50